# Altium PCB NDS_TV_OUT_PCB_V1I2.PcbDoc (part 2 of 2)
Units mm, origin at the board's own origin, x right, y up, seen from the top; angles counter-clockwise.
Board outline 38 x 49 mm, 4 copper layers (L1, L2-GND, L3-PW, L4), stack 0.603 mm thick; 44 components, 33 nets, 151 pads, 52 vias.
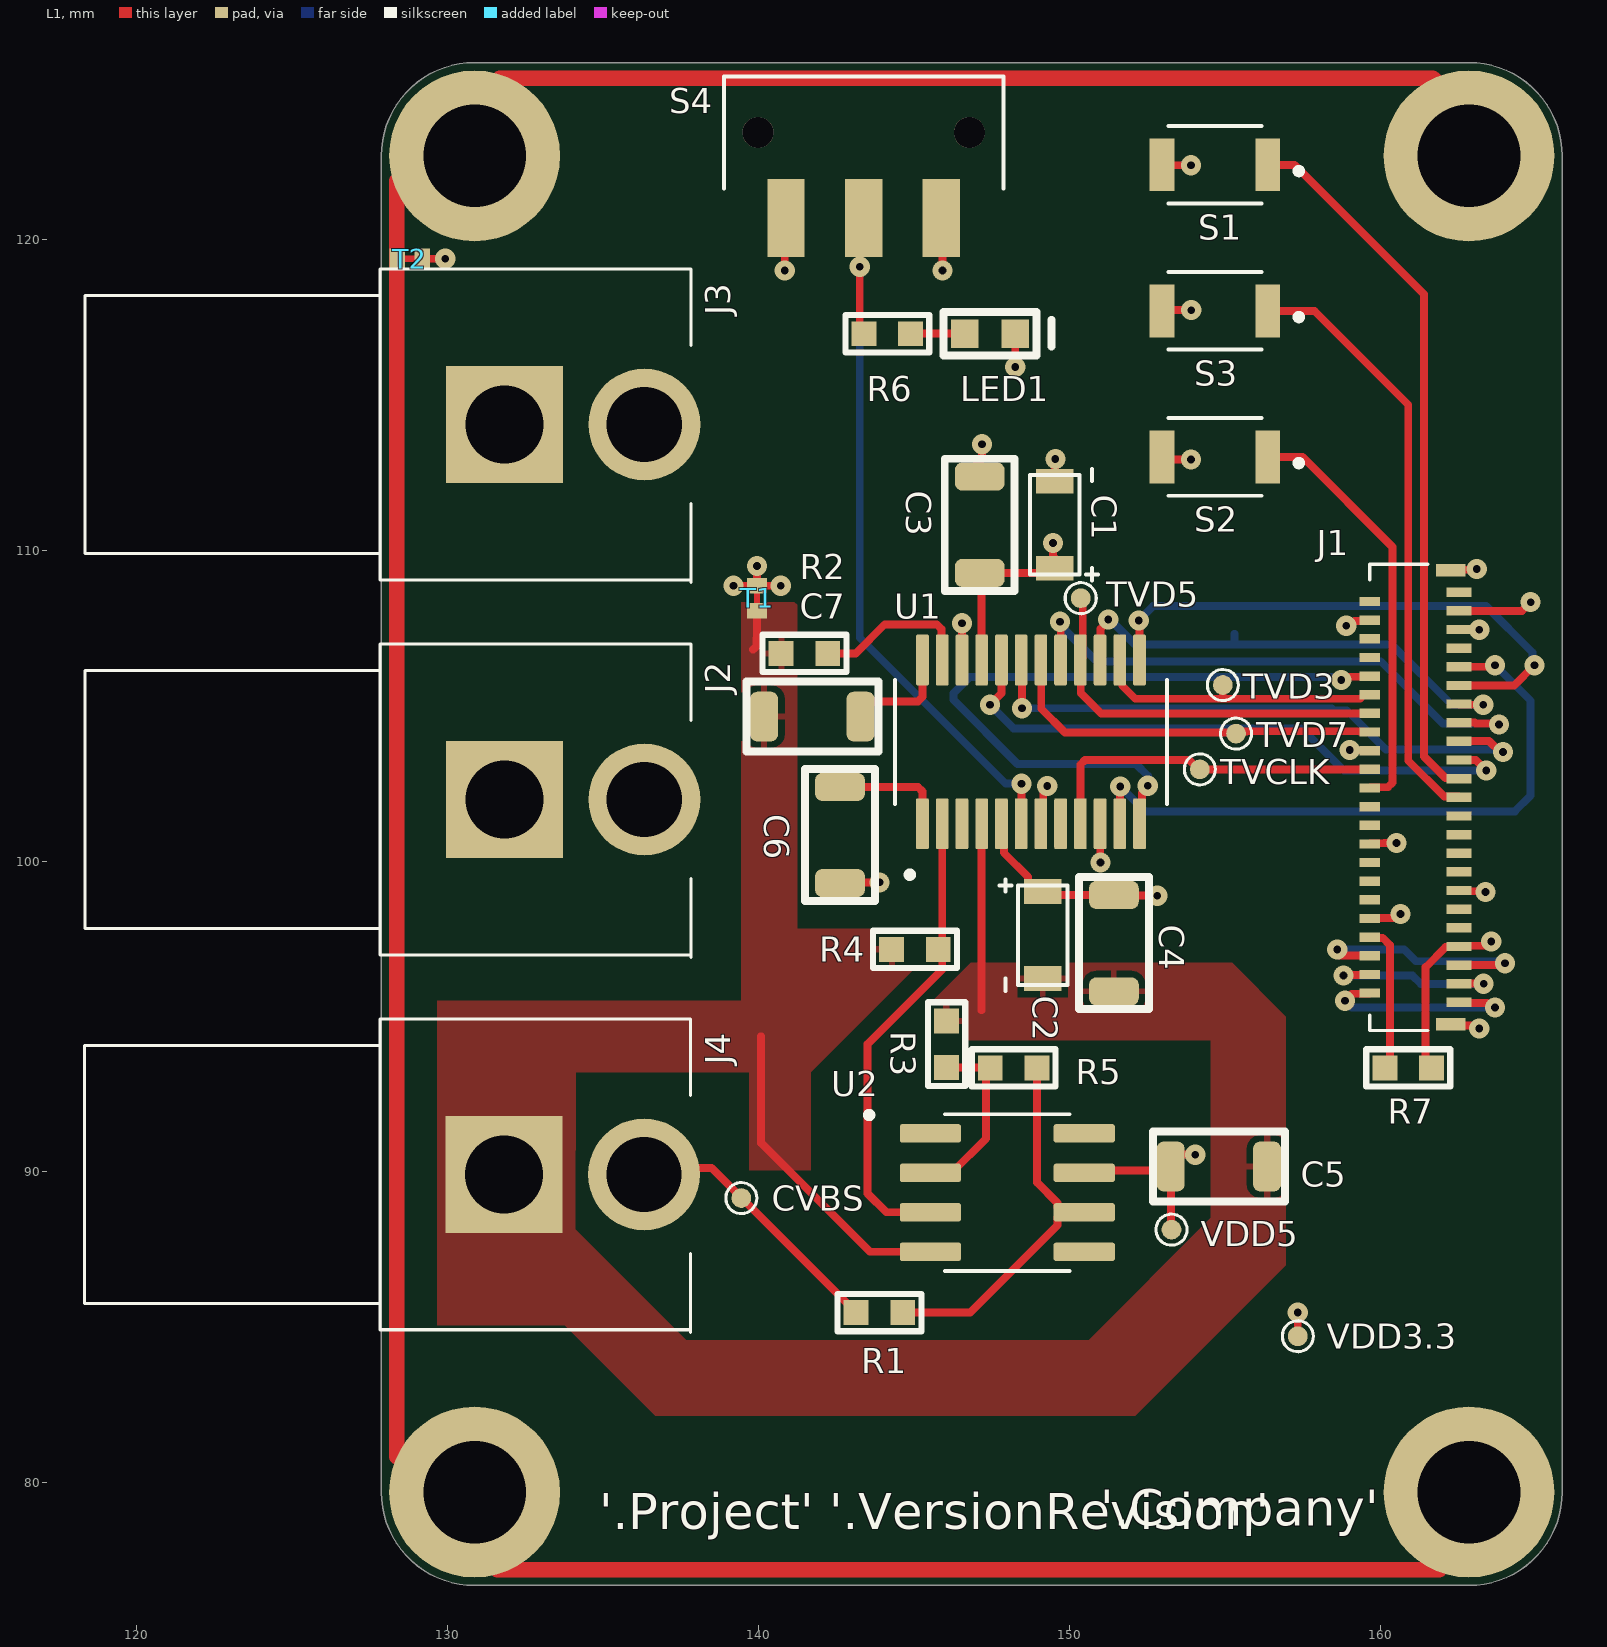
[diagram p0: L1 view]

## Polygon pours and split planes (outlines as drawn) (continued)
SG on L4 "SG_L04_P003" (solid, pour order 3): 129.921,115.951 133.731,115.951 133.731,99.441 143.383,89.789 162.052,89.789 164.084,91.821 164.084,95.758 163.068,95.758 163.068,96.393 165.608,96.393 165.608,89.281 163.195,86.868 142.367,86.868 129.921,99.314
SPRO on L4 "SPRO_L04_P005" (solid, pour order 5): 134.493,114.173 134.493,107.188 138.938,102.743 138.938,99.568 144.272,94.234 156.146,94.234 159.004,97.092 159.004,97.536 157.353,97.536 156.337,96.52 145.923,96.52 141.859,100.584 141.859,104.267 137.922,108.204 137.922,114.173
no net on L4 "NONET_L04_P002" (solid, pour order 2): 129.667,116.84
+3.3V on L3-PW "+3.3V_L03_P001" (solid, pour order 1): 142.113,116.459 146.159,120.505 147.982,120.505 147.982,113.257 153.543,107.696 153.543,98.171 146.538,91.166 146.538,86.888 153.035,86.888 159.766,93.619 159.766,105.814 161.721,107.769 163.582,107.784 163.488,89.447 157.226,83.185 143.751,83.198 142.113,84.836
no net on Board "NONET_L-01_P-001" (none): 127.855,79.692 cw(c127.862,79.692)
AGND on L1 "AGND_L01_P000" (solid, pour order 0): 141.243,108.331 141.243,97.825 144.98,97.825 144.992,96.51 141.681,93.199 141.681,90.043 139.7,90.043 139.7,93.199 134.112,93.199 134.098,88.152 137.668,84.582 150.622,84.582 154.559,88.519 154.559,94.234 145.542,94.234 145.551,95.448 146.826,96.723 155.245,96.723 156.972,94.996 156.972,86.995 152.123,82.146 136.676,82.145 133.757,85.064 129.667,85.064 129.667,95.504 139.446,95.504 139.446,108.331
GND on L2-GND (split plane): 130.862,125.182 162.862,125.182 162.878,125.183 163.079,125.174 163.295,125.146 163.507,125.099 163.714,125.034 163.915,124.95 164.108,124.85 164.291,124.733 164.464,124.601 164.624,124.454 164.771,124.294 164.903,124.121 165.02,123.938 165.12,123.745 165.204,123.544 165.269,123.337 165.316,123.125 165.344,122.909 165.353,122.708 165.352,122.692 165.352,79.692 165.353,79.676 165.344,79.475 165.316,79.259 165.269,79.047 165.204,78.84 165.12,78.639 165.02,78.446 164.903,78.263 164.771,78.09 164.624,77.93 164.464,77.783 164.291,77.651 164.108,77.534 163.915,77.434 163.714,77.35 163.507,77.285 163.295,77.238 163.079,77.21 162.878,77.201 162.862,77.202 130.862,77.202 130.846,77.201 130.645,77.21 130.429,77.238 130.217,77.285 130.01,77.35 129.809,77.434 129.616,77.534 129.433,77.651 129.26,77.783 129.1,77.93 128.953,78.09 128.821,78.263 128.704,78.446 128.604,78.639 128.52,78.84 128.455,79.047 128.408,79.259 128.38,79.475 128.371,79.676 128.372,79.692 128.372,122.692 128.371,122.708 128.38,122.909 128.408,123.125 128.455,123.337 128.52,123.544 128.604,123.745 128.704,123.938 128.821,124.121 128.953,124.294 129.1,124.454 129.26,124.601 129.433,124.733 129.616,124.85 129.809,124.95 130.01,125.034 130.217,125.099 130.429,125.146 130.645,125.174 130.846,125.183

## Silkscreen, mask and mechanical layers (free items; w line width, h text height)
Top Overlay:
  text "'.Company'" at 151.003,78.232 h2
  text "'.Project' '.VersionRevision'" at 134.874,78.105 h2
Bottom Overlay:
  region: 1401 vertices and 10 holes, not listed, extent 151.446,77.91 155.969,82.563
  text "'.Company'  '.Year'" at 150.876,78.994 h2
Board:
  the board outline again, w0.013